# Allegro board 201021 cranberry_fin.brd
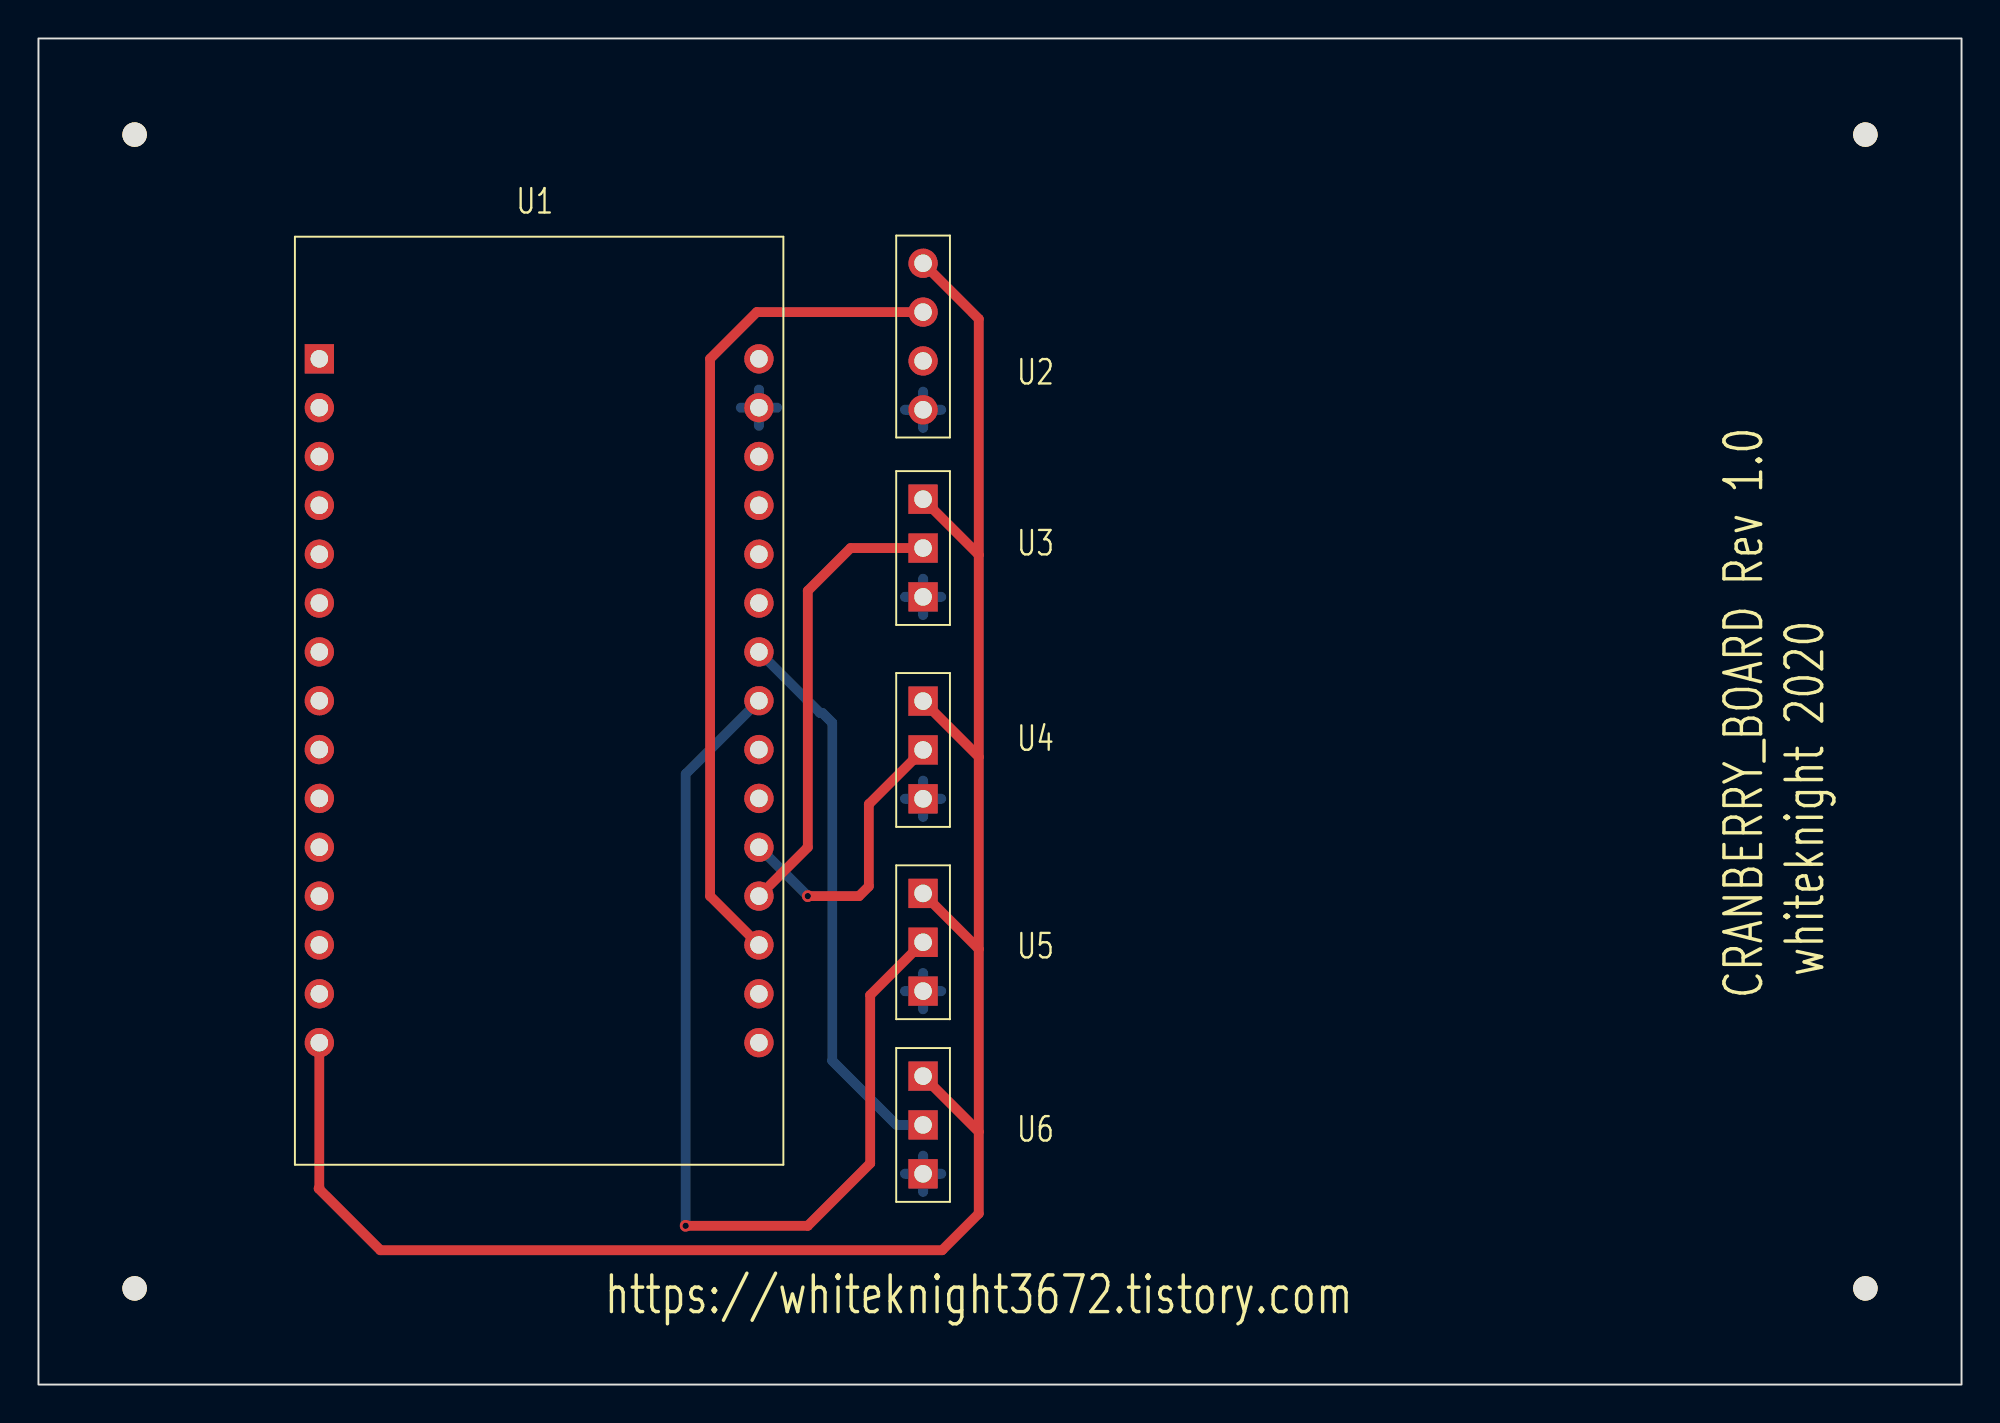
[diagram p0: board, top side]
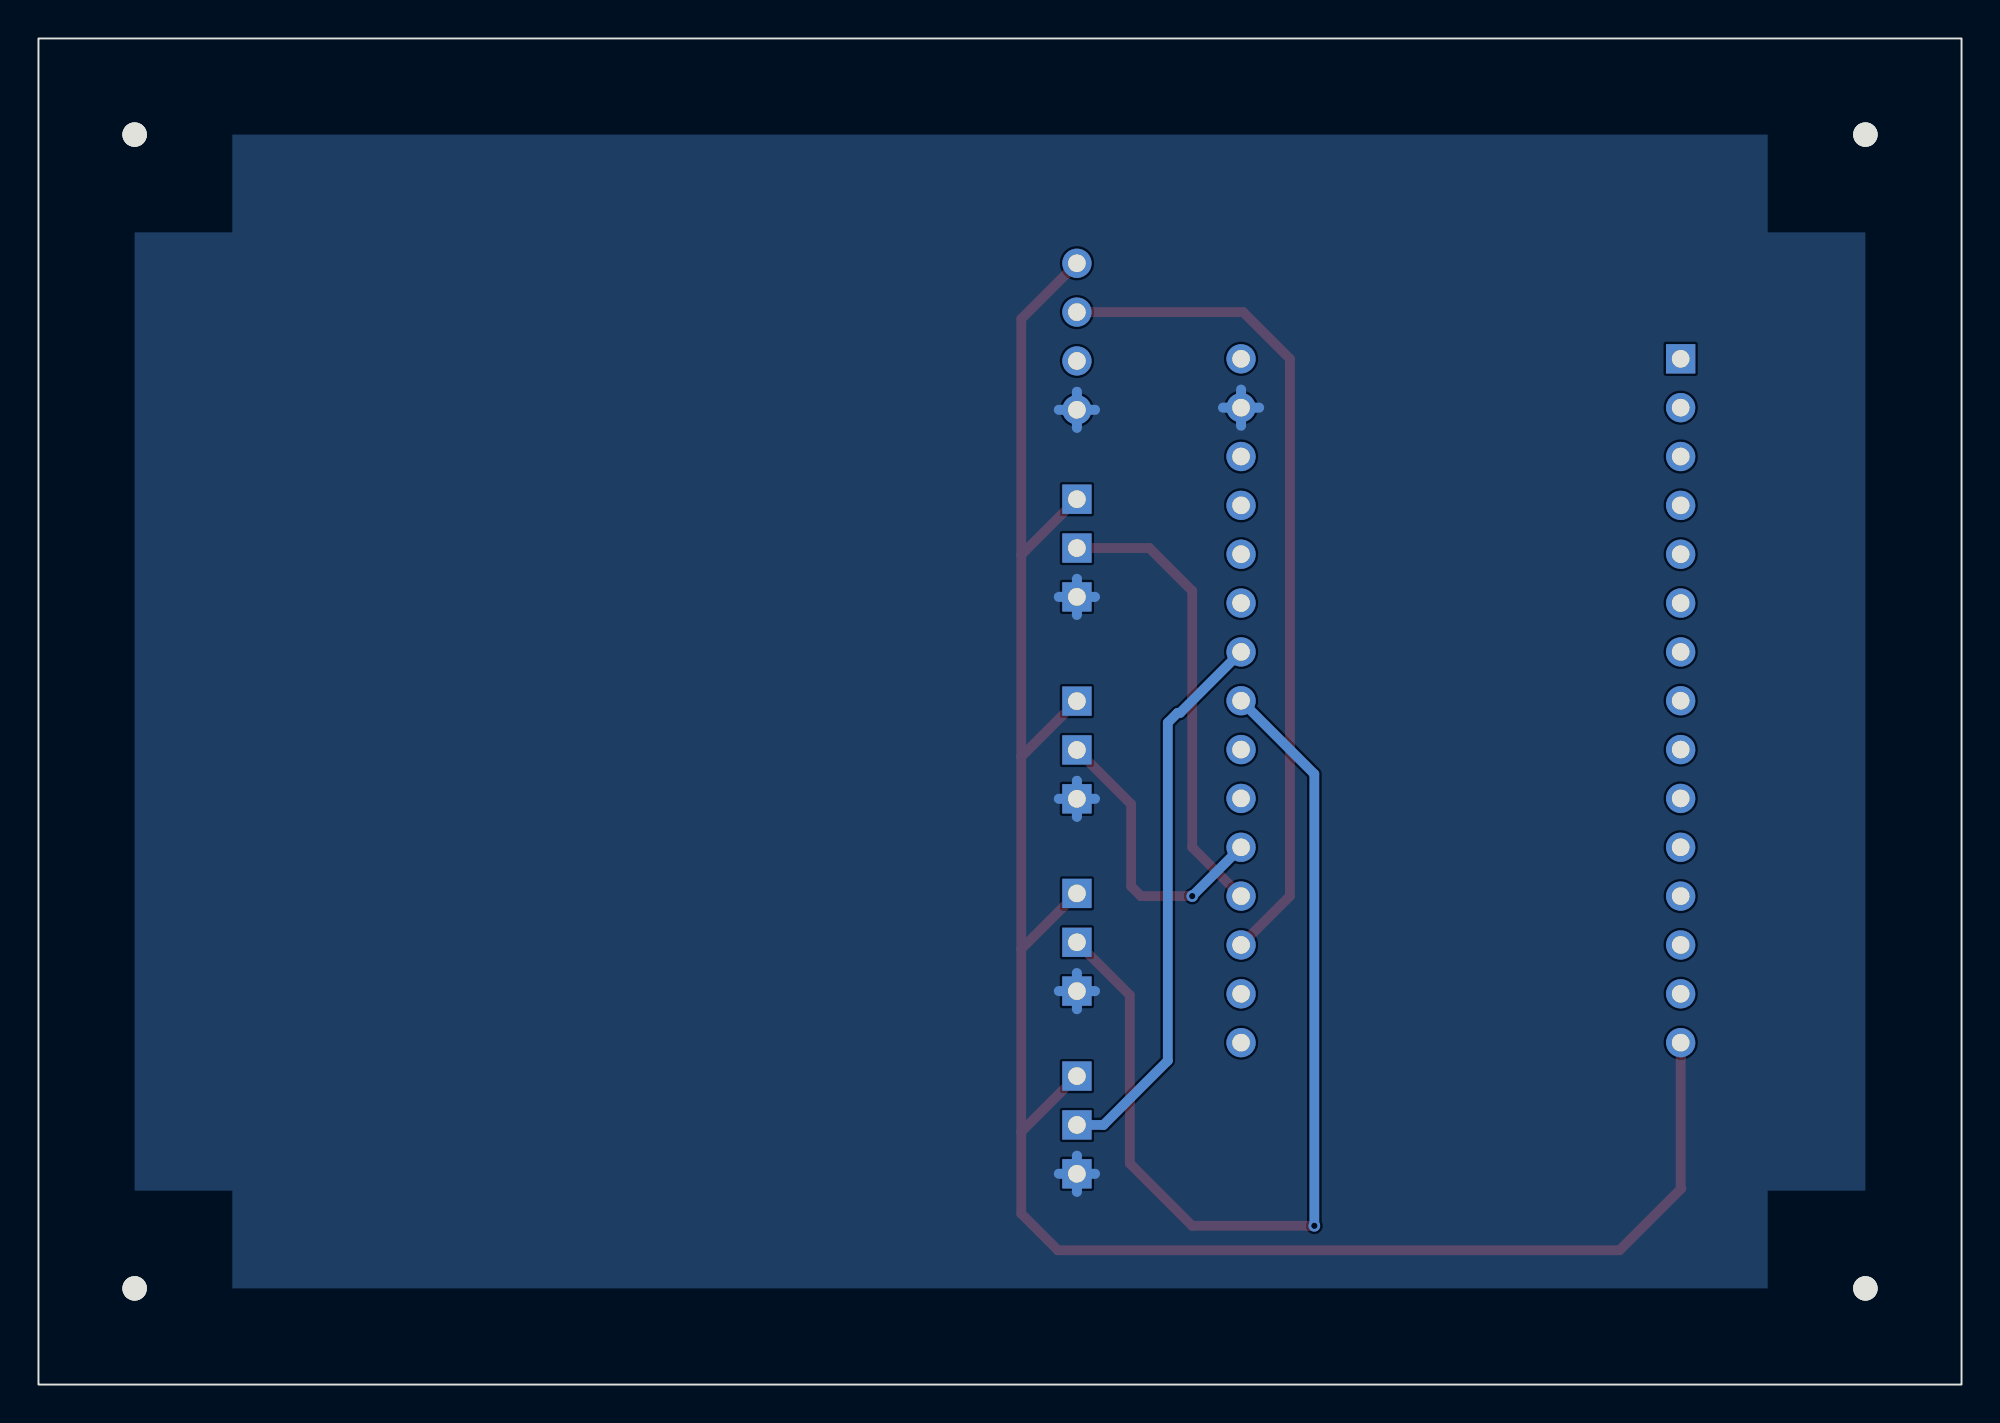
[diagram p1: board, bottom side, seen from below]

Outline 100 x 70 mm; copper layers: TOP, BOTTOM. Coordinates in mm from the lower left corner of the outline.
Outline path: rectangle 0,0 100,70

## Design rules (mm)
constraint set DEFAULT: min track width 0.508

## Placement (name value [footprint] x y rotation side)
NOREF  -  [unnamed]  95 5 0 top
NOREF#2  -  [#2]  100 0 90 top
NOREF#3  -  [unnamed]  95 65 0 top
NOREF#4  -  [#2]  0 70 0 top
NOREF#5  -  [unnamed]  5 65 0 top
NOREF#6  -  [unnamed]  5 5 0 top
NOREF#7  -  [#2]  95 5 90 top
U1  NODEMCU  [ESP12]  26.04 35.56 0 top
U2  AM2302  [DHT22]  46 54.5 0 top
U3  KY-022  [REL01]  46 43.5 0 top
U4  RELAY  [REL01]  46 33 0 top
U5  RELAY  [REL01]  46 23 0 top
U6  MOTION_SENSOR  [REL01]  46 13.5 0 top

## Library data of the parts
U1 = nodemcu
U2 = AM2302
U3-U6 = COMMON_PART

## Footprints (pads in the part's own frame, mm; a bottom-side part is the same pattern mirrored in y, then rotated)
DHT22
  round 1.524 hole 0.914: 1(0,3.81) 2(0,1.27) 3(0,-1.27) 4(0,-3.81)
ESP12
  rect 1.524x1.524 hole 0.914: 1(-11.43,17.78)
  round 1.524 hole 0.914: 2(-11.43,15.24) 3(-11.43,12.7) 4(-11.43,10.16) 5(-11.43,7.62) 6(-11.43,5.08) 7(-11.43,2.54) 8(-11.43,0) 9(-11.43,-2.54) 10(-11.43,-5.08) 11(-11.43,-7.62) 12(-11.43,-10.16) 13(-11.43,-12.7) 14(-11.43,-15.24) 15(-11.43,-17.78) 16(11.43,-17.78) 17(11.43,-15.24) 18(11.43,-12.7) 19(11.43,-10.16) 20(11.43,-7.62) 21(11.43,-5.08) 22(11.43,-2.54) 23(11.43,0) 24(11.43,2.54) 25(11.43,5.08) 26(11.43,7.62) 27(11.43,10.16) 28(11.43,12.7) 29(11.43,15.24) 30(11.43,17.78)
REL01
  rect 1.524x1.524 hole 0.914: 1(0,2.54) 2(0,0) 3(0,-2.54)
unnamed
  round 1.27 hole 3.2 unplated: (0,0)

## Nets
N00270: U1.15(VIN) U2.1(VCC) U3.1(VCC) U4.1(VCC) U5.1(VCC) U6.1(VCC)
N00353: U1.29 U2.4 U3.3 U4.3 U5.3 U6.3
N00843: U1.18 U2.2
N00887: U1.19 U3.2
N00891: U1.20 U4.2
N00950: U1.23 U5.2
N01004: U1.24 U6.2

Pads without a net: U1 1 2 3 4 5 6 7 8 9 10 11 12 13 14 16 17 21 22 25 26 27 28 30; U2 3

## Via types
v1: diameter 0.61, hole 0.33, TOP to BOTTOM, 2 vias

## Routing (per net, layer and track width the routed paths; a pad name or vN(x,y) marks a point on that pad's centre or on a via; arc(x,y) is an arc through that point)
N00270: length 111
  TOP w0.508: 48.9,22.64 48.9,32.65 ; 48.9,22.64 48.9,13.14 ; 48.9,22.64 U5.1 ; 48.9,32.65 48.9,43.15 ; 48.9,32.65 U4.1 ; U1.15 14.61,10.23 14.57,10.2 17.78,6.99 46.99,6.99 48.9,8.89 48.9,13.14 ; 48.9,13.14 U6.1 ; 48.9,43.15 48.9,55.41 U2.1 ; 48.9,43.15 U3.1
N00353: length 22.6
  BOTTOM w0.521: U2.4 46,51.63 ; U2.4 45.06,50.69 ; U2.4 46,49.75 ; U2.4 46.94,50.69 ; 45.06,20.46 U5.3 ; U5.3 46,21.4 ; U5.3 46,19.52 ; U5.3 46.94,20.46 ; 37.47,49.86 U1.29 ; U1.29 36.52,50.8 ; U1.29 38.41,50.8 ; U1.29 37.47,51.74 ; U4.3 46,31.4 ; U4.3 45.06,30.46 ; U4.3 46,29.52 ; U4.3 46.94,30.46 ; 46,40.02 U3.3 ; U3.3 45.06,40.96 ; U3.3 46,41.9 ; U3.3 46.94,40.96 ; 45.06,10.96 U6.3 ; U6.3 46,10.02 ; U6.3 46.94,10.96 ; U6.3 46,11.9
N00843: length 43.6
  TOP w0.508: U1.18 34.92,25.4 34.92,53.34 37.35,55.77 U2.2
N00887: length 23.8
  TOP w0.508: U1.19 40.01,27.94 40.01,41.27 42.23,43.5 U3.2
N00891: length 15.2
  TOP w0.508: U4.2 43.18,30.18 43.18,25.91 42.67,25.4 v1(40.01,25.4)
  BOTTOM w0.508: U1.20 v1(40.01,25.4)
N00950: length 52.5
  TOP w0.508: v1(33.66,8.26) 40.01,8.26 43.25,11.5 43.25,20.25 U5.2
  BOTTOM w0.508: U1.23 33.66,31.75 v1(33.66,8.26)
N01004: length 29
  BOTTOM w0.508: U1.24 40.64,34.92 40.77,34.92 41.27,34.42 41.27,16.84 44.62,13.5 U6.2

## Copper pours and planes (outline as drawn; the poured copper is in the pictures)
N00353 on BOTTOM: 5,5 5,65 95,65 95,5

## Text on the board
Ref Des/Silkscreen Top: https://whiteknight3672.tistory.com | CRANBERRY_BOARD Rev 1.0 | whiteknight 2020
NCLEGEND-1-2: FIGURE | FINISHED_SIZE | 0.3302 | 0.9144 | 3.2 | DRILL CHART: TOP to BOTTOM | ALL UNITS ARE IN MILLIMETERS | PLATED | NON-PLATED | QTY | 2 | 46 | 4
